# Altium PCB M4QIDB-PCB-01-DONE.PcbDoc
Units mil, origin at the board's own origin, x right, y up, seen from the top; angles counter-clockwise.
Board outline 2500 x 1500 mil, 2 copper layers (Top Layer, Bottom Layer), stack 62.8 mil thick; 91 components, 86 nets, 364 pads, 103 vias.
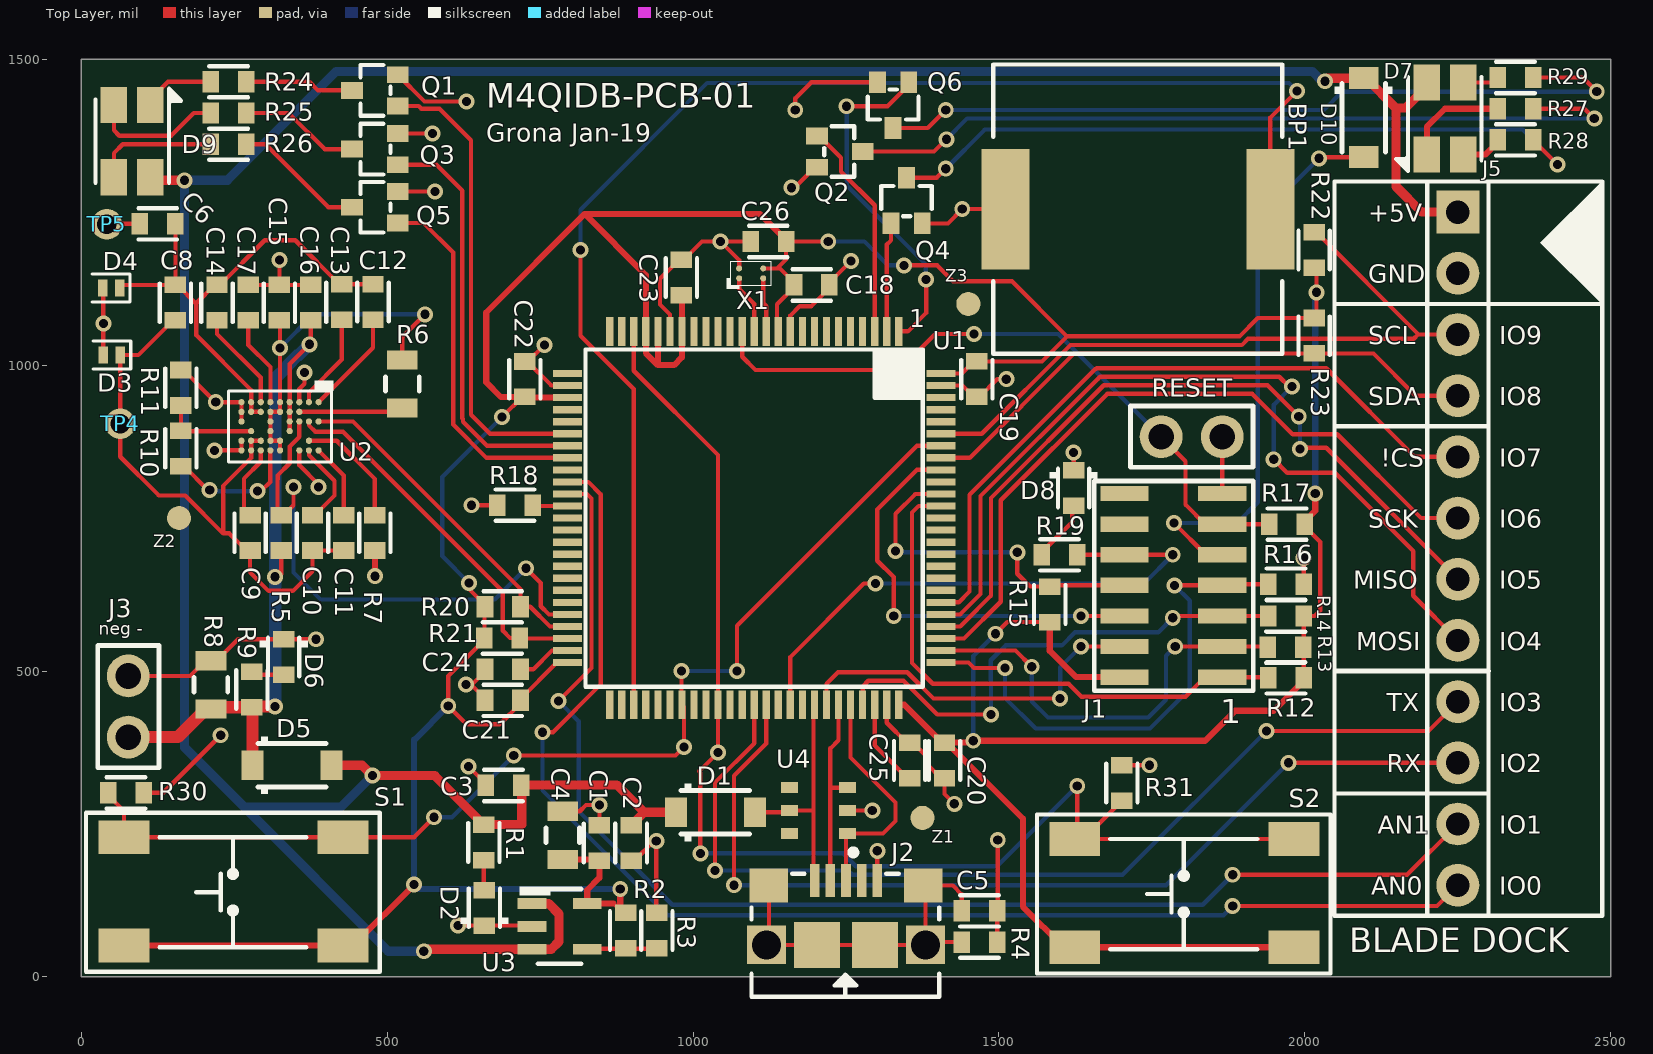
[diagram p0: Top Layer view]
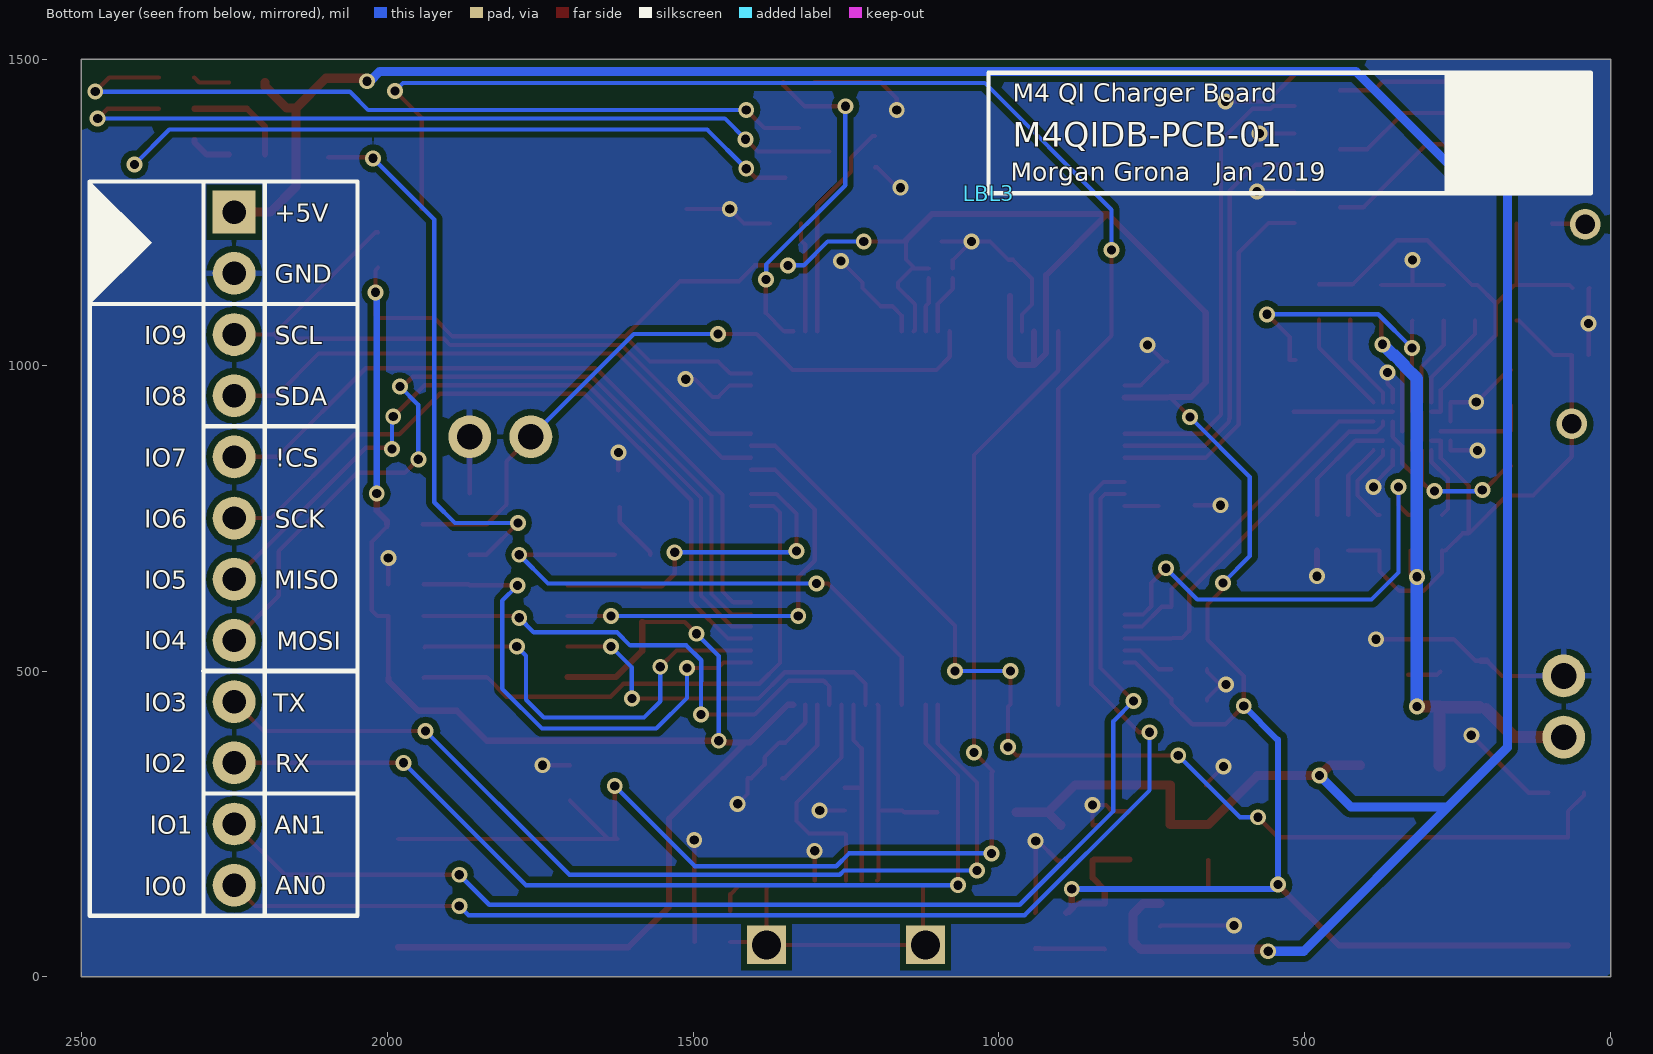
[diagram p1: Bottom Layer view, seen from below]

## Layer stack, top to bottom
Top Solder: solder mask 0.4, Solder Resist, Dk 3.5
Top Layer: signal copper 1.4
Dielectric1: core 60, FR-4, Dk 4.8
Bottom Layer: signal copper 1.4
Bottom Solder: solder mask 0.4, Solder Resist, Dk 3.5

## Board outline
0,0 0,1500 2500,1500 2500,0

## Design rules (kind name [scope] priority, off if disabled: settings)
Clearance ClearancePoly [All vs InPoly] p1: gap=10 ignorepadtopadclearanceinfootprint=FALSE except(0: Arc-Hole Track-Hole SMDPad-Hole THPad-Hole Via-Hole Fill-Hole Poly-Hole Region-Hole Text-Hole)
Clearance [All] p2: gap=5 ignorepadtopadclearanceinfootprint=FALSE except(0: Arc-Hole Track-Hole SMDPad-Hole THPad-Hole Via-Hole Fill-Hole Poly-Hole Region-Hole Text-Hole) // changed to 5 from 7
DiffPairsRouting [All] p1: maxlimit=10 minlimit=10 mostfreqgap=10 toplayer_minwidth=15 toplayer_maxwidth=15 toplayer_prefwidth=15 bottomlayer_minwidth=15 bottomlayer_maxwidth=15 bottomlayer_prefwidth=15 maxuncoupledlength=500
HoleSize [All] p1: absolutevalues=TRUE maxlimit=250 minlimit=7 maxpercent=80.000 minpercent=20.000
HoleToHoleClearance [All] p1: gap=7 allowstackedmicrovias=TRUE
MinimumSolderMaskSliver [All] p1 off: minsoldermaskwidth=4
PolygonConnect PolygonConnectVia [All vs IsVia] p1: connectstyle=Direct reliefconductorwidth=10 reliefentries=4 polygonreliefangle="90 Angle" airgapwidth=10
PolygonConnect [All] p2: connectstyle=Relief reliefconductorwidth=10 reliefentries=4 polygonreliefangle="90 Angle" airgapwidth=10
RoutingVias [All] p1: holewidth=17 width=30 viastyle="Through Hole" minholewidth=17 minwidth=30 maxholewidth=100 maxwidth=100
SilkToSilkClearance [All] p1 off: silktosilkclearance=7
SilkToSolderMaskClearance SilkscreenOverComponentPads [IsPad] p1 off: minsilkscreentomaskgap=7 clearancetoexposedcopper=TRUE
SolderMaskExpansion [All] p1: expansion=4
Width [All] p1: maxlimit=100 minlimit=7 preferedwidth=7 minimp=50.000000 maximp=50.000000 favimp=50.000000
24 further rules are at their usual default settings.

## Classes and differential pairs
differential pair USB_DATA: +USB_DATA_P -USB_DATA_N

## Components (designator, comment, footprint, x,y, rotation, side; value= is the part's Value field where it differs from the comment)
BP1 "PS1240P02AT" "BUZZER SFM-1240" 1727,1255 r270 top
C1 "1uF" "0603 CAP3D" 847,219 r90 top
C2 "0.1uF" "0603 CAP3D" 899,219 r270 top
C3 "1uF" "0603 CAP3D" 690,313 r180 top
C4 "10uF 0805" "0805 CAP3D" 787,231 r90 top
C5 "0.1uF" "0603 CAP3D" 1468,108 r0 top
C6 "100nF 0603" "0603 CAP3D" 125,1231 r180 top
C8 "3.9nF" "0603 CAP3D" 154,1102 r270 top
C9 "15nF" "0603 CAP3D" 276,726 r270 top
C10 "100nF" "0603 CAP3D" 378,726 r270 top
C11 "47nF" "0603 CAP3D" 429,726 r270 top
C12 "47nF" "0603 CAP3D" 477,1103 r90 top
C13 "100nF" "0603 CAP3D" 426,1103 r90 top
C14 "15nF" "0603 CAP3D" 222,1102 r90 top
C15 "15nF" "0603 CAP3D" 324,1102 r270 top
C16 "15nF" "0603 CAP3D" 375,1102 r270 top
C17 "15nF" "0603 CAP3D" 273,1102 r270 top
C18 "1uF" "0603 CAP3D" 1194,1131 r0 top
C19 "1uF" "0603 CAP3D" 1464,977 r270 top
C20 "1uF" "0603 CAP3D" 1411,354 r270 top
C21 "1uF" "0603 CAP3D" 689,452 r180 top
C22 "1uF" "0603 CAP3D" 725,976.9 r90 top
C23 "1uF" "0603 CAP3D" 981,1143 r90 top
C24 "2.2uF" "0603 CAP3D" 689,503 r180 top
C25 "2.2uF" "0603 CAP3D" 1354,354 r90 top
C26 "0.01uF" "0603 CAP3D" 1123,1202 r180 top
D1 "1N5819" SOD123 1037,269 r180 top
D2 "GRN 0603" "0603 AK" 659,113 r270 top
D3 "PESD12VV1BL" SOD882 50,1016.48 r180 top
D4 "PESD12VV1BL" SOD882 49,1126 r180 top
D5 "1N5819" SOD123 345,346 r180 top
D6 "BLU 0603" "0603 AK" 331,523 r90 top
D7 "1N5819" "SOD123 AK" 2096,1404 r90 top
D8 "RED 0603" "0603 AK" 1622,799 r90 top
D9 "RGB PLCC4" "PLCC-4 RGB" 83,1366 r0 top
D10 "RGB PLCC4" "PLCC-4 RGB" 2229,1403 r180 top
J1 "JTAG/SERIAL" "CONN 14POS 7X2 SMT FEMALE" 1785,640 r180 top
J2 "MICRO AB" "CONN USB MICRO B SMT LEGS FCI 10118193" 1250,105 r0 top locked
J3 "CONN SIP 2" HDR1X2 77,442 r90 top
J5 "BLADE Parent" "HDR1X12 ENGENUICS PARENT" 2250,700 r0 top
LBL3 "PCB REV" "LABEL PCB REVISION" 1017,1281 r180 bottom
Q1 "2N7002" SC-70-3 480,1449 r270 top
Q2 "2N7002" SC-70-3 1240,1349 r90 top
Q3 "2N7002" SC-70-3 480,1353 r270 top
Q4 "2N7002" SC-70-3 1349,1269 r180 top
Q5 "2N7002" SC-70-3 480,1258 r270 top
Q6 "2N7002" SC-70-3 1327,1425 r0 top
R1 "390R" 0603 658,220 r90 top
R2 "698k" 0603 890,76 r90 top
R3 "100k" 0603 941,76 r90 top
R4 "100k" 0603 1468,57 r180 top
R5 "100k" 0603 327,726 r90 top
R6 "30R 0805 500mW" 0805 525,969.5 r270 top
R7 "100k" 0603 480,726 r270 top
R8 "90R 0805 500mW" 0805 212,477 r90 top
R9 "1k" 0603 279,470 r90 top
R10 "100k" 0603 163,864 r90 top
R11 "100k" 0603 163,963 r90 top
R12 "10k" 0603 1969,489 r0 top
R13 "10k" 0603 1968,539 r0 top
R14 "10k" 0603 1969,590 r0 top
R15 "10k" 0603 1583,609 r90 top
R16 "10k" 0603 1969,642 r180 top
R17 "100k" 0603 1971,740 r0 top
R18 "100k" 0603 709,771 r180 top
R19 "1k" 0603 1599,690 r0 top
R20 "10k" 0603 689,605 r180 top
R21 "10k" 0603 688,554 r180 top
R22 "10k" 0603 2015,1188 r270 top
R23 "10k" 0603 2015,1048 r90 top
R24 "150R" 0603 241,1463 r0 top
R25 "150R" 0603 241,1412 r0 top
R26 "150R" 0603 241,1361 r0 top
R27 "150R" 0603 2344,1419 r0 top
R28 "150R" 0603 2344,1368 r0 top
R29 "150R" 0603 2344,1470 r0 top
R30 "100k" 0603 73,301 r180 top
R31 "100k" 0603 1701,317 r270 top
RESET "PADS ONLY" HDR1X2 1815,883 r180 top (schematic designator J4)
S1 "SPST" "SWITCH TACT SMT TL3301" 249,140 r180 top
S2 "SPST" "SWITCH TACT SMT TL3301" 1803,137 r180 top
TP4 "A1A" "TEST POINT THRU HOLE" 64,904 r0 top
TP5 "A1B" "TEST POINT THRU HOLE" 42,1230 r0 top
U1 "STM32F407VET6" LQFP100 1100,750 r180 top locked
U2 "STWLC33JR" "FLIP CHIP 3.97x2.67mm" 325,900 r180 top locked
U3 "MCP1824" SOT23-5 782,83 r270 top
U4 "IP4220CZ6,125" TSOP95P280X110-6N 1205,272 r180 top
X1 "SIT8021AC" "CSP 1.55mm x 0.85mm" 1095,1150 r0 top locked
Z1 "PCB" "FIDUCIAL PCB"#1 1562,409 r0 top
Z2 "PCB" "FIDUCIAL PCB"#2 1688,-228 r0 top
Z3 "PCB" "FIDUCIAL PCB"#3 1800,-228 r0 top

## Footprints (in the part's own frame and the unit in brackets; to place one, negate y for a bottom-side part, rotate by r counter-clockwise, add the part's x,y. Pads: shape width x height; smd on the part's side, far side on the other; paste and mask are expansions set on the pad)
0603 [mil]
  rect 27x35 smd: 1(-29,0) 2(29,0)
  silkscreen extent -31,-26 31,26, body extent -33,-18 33,18, height 22
"0603 AK" [mil]
  rect 27x35 smd: A(-29,0) K(29,0)
  silkscreen extent -31,-39 31,39, body extent -33,-18 33,18, height 30
"0603 CAP3D" [mil]
  rect 27x35 smd: 1(-29,0) 2(29,0)
  silkscreen extent -31,-26 31,26, body extent -37,-16 37,16, height 35
0805 [mm]
  rect 0.8x1.27 smd: 1(-0.99,-0.003) 2(1.011,-0.003)
  silkscreen extent -0.29,-0.7 0.31,0.7, body extent -1.05,-0.67 1.05,0.68, height 1.35
"0805 CAP3D" [mm]
  rect 0.8x1.27 smd: 1(-0.99,-0.003) 2(1.011,-0.003)
  silkscreen extent -0.29,-0.7 0.31,0.7, body extent -1.05,-0.67 1.05,0.68, height 0.95
"BUZZER SFM-1240" [mm]
  rect 5x2 smd: 1(0,5.5) 2(0,-5.5)
  silkscreen extent -6,-6 6,6, body extent -6,-6 6,6, height 3
"CONN 14POS 7X2 SMT FEMALE" [mil]
  rect 78.74x25 smd: 1(-80,150) 2(80,150) 3(-80,100) 4(80,100) 5(-80,50) 6(80,50) 7(-80,0) 8(80,0) 9(-80,-50) 10(80,-50) 11(-80,-100) 12(80,-100) 13(-80,-150) 14(80,-150)
  silkscreen extent -131,-170 129,172, body extent -98,-184 98,184, height 173
"CONN USB MICRO B SMT LEGS FCI 10118193" [mm]
  rect 1.6x1.6 hole 1.2: 0(-3.3,-1.337) 0(3.3,-1.337)
  rect 1.6x1.4 smd: 0(-3.2,1.126) 0(3.2,1.127)
  rect 1.9x1.9 smd: 0(-1.2,-1.337) 0(1.2,-1.337)
  rect 0.4x1.35 smd: 1(-1.3,1.338) 2(-0.65,1.338) 3(0,1.338) 4(0.65,1.338) 5(1.3,1.338)
  silkscreen extent -3.93,-3.49 3.87,1.62, body extent -3.99,-3.94 3.99,1.49, height 2.71
"CSP 1.55mm x 0.85mm" [mm]
  round 0.25 smd paste+0 mask+0.1: 1(-0.5,-0.205) 2(0.5,-0.205) 3(0.5,0.205) 4(-0.5,0.205)
  silkscreen extent -1.02,-0.66 0.84,0.5, body extent -0.78,-0.43 0.78,0.43, height 0.6
"FIDUCIAL PCB"#1 [mil]
  round 39.37 smd paste-100 mask+4: 1(-187,-149)
"FIDUCIAL PCB"#2 [mil]
  round 39.37 smd paste-100 mask+4: 1(-1528,978)
"FIDUCIAL PCB"#3 [mil]
  round 39.37 smd paste-100 mask+4: 1(-350,1328)
"FLIP CHIP 3.97x2.67mm" [mm]
  round 0.26 smd paste+0 mask+0.025: A1(-1.6,-1) A3(-1.6,-0.2) A6(-1.6,1) B1(-1.2,-1) B3(-1.2,-0.2) B5(-1.2,0.6) B6(-1.2,1) C1(-0.8,-1) C2(-0.8,-0.6) C3(-0.8,-0.2) C6(-0.8,1) D1(-0.4,-1) D2(-0.4,-0.6) D3(-0.4,-0.2) D4(-0.4,0.2) E1(0,-1) E2(0,-0.6) E5(0,0.6) E6(0,1) F1(0.4,-1) F2(0.4,-0.6) F3(0.4,-0.2) F4(0.4,0.2) F5(0.4,0.6) F6(0.4,1) G1(0.8,-1) G2(0.8,-0.6) G5(0.8,0.6) G6(0.8,1) H1(1.2,-1) H2(1.2,-0.6) H4(1.2,0.2) H5(1.2,0.6) H6(1.2,1) I1(1.6,-1) I2(1.6,-0.6) I3(1.6,-0.2) I5(1.6,0.6) I6(1.6,1)
  silkscreen extent -2.21,-1.91 2.13,1.47, body extent -1.97,-1.32 1.97,1.32, height 0.6
HDR1X2 [mil]
  round 70 hole 42: 1(-50,0) 2(50,0)
  silkscreen extent -100,-50 100,50, body extent -104,-46 104,46, height 425
"HDR1X12 ENGENUICS PARENT" [mil]
  rect 70x70 hole 38: 1(0,550)
  round 70 hole 38: 2(0,450) 3(0,350) 4(0,250) 5(0,150) 6(0,50) 7(0,-50) 8(0,-150) 9(0,-250) 10(0,-350) 11(0,-450) 12(0,-550)
  silkscreen extent -202,-600 236,600, body extent -8,-610 405,610, height 108
"LABEL PCB REVISION" [mil]
  silkscreen extent 0,0 984,197
LQFP100 [mm]
  rect 0.3x1.2 smd mask+0.025: 1(-6,-7.75) 2(-5.5,-7.75) 3(-5,-7.75) 4(-4.5,-7.75) 5(-4,-7.75) 6(-3.5,-7.75) 7(-3,-7.75) 8(-2.5,-7.75) 9(-2,-7.75) 10(-1.5,-7.75) 11(-1,-7.75) 12(-0.5,-7.75) 13(0,-7.75) 14(0.5,-7.75) 15(1,-7.75) 16(1.5,-7.75) 17(2,-7.75) 18(2.5,-7.75) 19(3,-7.75) 20(3.5,-7.75) 21(4,-7.75) 22(4.5,-7.75) 23(5,-7.75) 24(5.5,-7.75) 25(6,-7.75) 51(6,7.75) 52(5.5,7.75) 53(5,7.75) 54(4.5,7.75) 55(4,7.75) 56(3.5,7.75) 57(3,7.75) 58(2.5,7.75) 59(2,7.75) 60(1.5,7.75) 61(1,7.75) 62(0.5,7.75) 63(0,7.75) 64(-0.5,7.75) 65(-1,7.75) 66(-1.5,7.75) 67(-2,7.75) 68(-2.5,7.75) 69(-3,7.75) 70(-3.5,7.75) 71(-4,7.75) 72(-4.5,7.75) 73(-5,7.75) 74(-5.5,7.75) 75(-6,7.75)
  rect 1.2x0.3 smd mask+0.025: 26(7.75,-6) 27(7.75,-5.5) 28(7.75,-5) 29(7.75,-4.5) 30(7.75,-4) 31(7.75,-3.5) 32(7.75,-3) 33(7.75,-2.5) 34(7.75,-2) 35(7.75,-1.5) 36(7.75,-1) 37(7.75,-0.5) 38(7.75,0) 39(7.75,0.5) 40(7.75,1) 41(7.75,1.5) 42(7.75,2) 43(7.75,2.5) 44(7.75,3) 45(7.75,3.5) 46(7.75,4) 47(7.75,4.5) 48(7.75,5) 49(7.75,5.5) 50(7.75,6) 76(-7.75,6) 77(-7.75,5.5) 78(-7.75,5) 79(-7.75,4.5) 80(-7.75,4) 81(-7.75,3.5) 82(-7.75,3) 83(-7.75,2.5) 84(-7.75,2) 85(-7.75,1.5) 86(-7.75,1) 87(-7.75,0.5) 88(-7.75,0) 89(-7.75,-0.5) 90(-7.75,-1) 91(-7.75,-1.5) 92(-7.75,-2) 93(-7.75,-2.5) 94(-7.75,-3) 95(-7.75,-3.5) 96(-7.75,-4) 97(-7.75,-4.5) 98(-7.75,-5) 99(-7.75,-5.5) 100(-7.75,-6)
  silkscreen extent -7,-7 7,7
"PLCC-4 RGB" [mm]
  rect 1.1x1.5 smd: A(0.75,-1.5) KB(-0.75,-1.5) KG(-0.75,1.5) KR(0.75,1.5)
  silkscreen extent -1.51,-1.73 2.03,2.17, body extent -1.5,-2 1.5,2, height 2.2
SC-70-3 [mm]
  rect 0.7x0.9 smd paste+0: 1(0.65,0.95) 2(-0.65,0.95) 3(0,-0.95)
  silkscreen extent -1.05,-0.6 1.05,0.65, body extent -1.07,-0.95 1.08,0.95, height 1.1
SOD123 [mil]
  rect 36x48 smd: 1(-64.09,-0.13) 2(64.91,-0.13)
  silkscreen extent -56,-47 56,47, body extent -76,-33 75,34, height 57
"SOD123 AK" [mil]
  rect 36x48 smd: A(-64.09,-0.13) K(64.91,-0.13)
  silkscreen extent -56,-47 56,47, body extent -76,-33 75,34, height 57
SOD882 [mm]
  rect 0.4x0.7 smd paste-0.05 mask+0.05: 1(-0.35,0) 2(0.35,0)
  silkscreen extent -0.79,-0.58 0.79,0.58, body extent -0.65,-0.45 0.65,0.45, height 0.5
SOT23-5 [mm]
  rect 0.45x1.2 smd mask+0.025: 1(-0.94,-1.153) 2(0.011,-1.153) 3(0.96,-1.153) 4(0.96,1.147) 5(-0.94,1.147)
  silkscreen extent -1.65,-1.68 1.56,0.9, body extent -1.55,-1.6 1.55,1.6, height 1.5
"SWITCH TACT SMT TL3301" [mil]
  rect 83x55 smd: 1(-179,-88.5) 2(179,-88.5) 3(-179,88.5) 4(179,88.5)
  silkscreen extent -239,-129 241,132, body extent -200,-118 200,118, height 201
"TEST POINT THRU HOLE" [mil]
  round 50 hole 32: 1(0,0)
TSOP95P280X110-6N [mm] "TSOP, 6-Leads, Body 3.1x1.7mm (max), Pitch 0.95mm, IPC Medium Density"
  rect 0.7x0.45 smd: 1(-1.2,0.95) 2(-1.2,0) 3(-1.2,-0.95) 4(1.2,-0.95) 5(1.2,0) 6(1.2,0.95)
  silkscreen extent -1.57,1.61 -1.32,1.86, body extent -1.5,-1.55 1.5,1.55, height 1.25

## Part data
BP1: library part "BUZZER SMT SFM-1240"
C1 C2 C3 C4 C5 C6 C8 C9 C10 C11 C12 C13 C14 C15 C16 C17 C18 C19 C20 C21 C22 C23 C24 C25 C26: library part "CAPACITOR NON-POLARIZED"
D1 D5: library part "DIODE SCHOTTKY"
D2: library part "LED T1-3/4", "LED"
D3 D4: library part "DIODE ESD PESD12VVBL"
D6 D8: library part "LED AK"
D7: library part "DIODE SCHOTTKY AK"
D9 D10: library part "LED RGB AK"
J1: library part "CONN JTAG/SERIAL DEBUG 14POS FEMALE ENGENUICS"
J2: library part "CONN USB MICRO AB FCI 10104111"
J3: library part "CONN 2POS MOLEX 5037630291"
J5: library part "CONN ENGENUICS BLADE PARENT"
LBL3: library part "LABEL PCB REVISION"
Q1 Q2 Q3 Q4 Q5 Q6: library part "TRANS NMOS 1G 2S 3D"
R1 R2 R3 R4 R5 R6 R7 R8 R9 R10 R11 R12 R13 R14 R15 R16 R17 R18 R19 R20 R21 R22 R23 R24 R25 R26 R27 R28 R29 R30 R31: library part RESISTOR
RESET: library part "CONN SIP 2"
S1 S2: library part "SWITCH SPST", "SPST TACT SWITCH"
TP4 TP5: library part "TEST POINT THRU HOLE"
U1: library part "MCU STM32F407Vx M4QIDB"
U2: library part "IC WIRESLESS CHARGER STWLC33JR"
U3: library part "VREG MCP1824"
U4: library part "IC ESD USB DUAL NXP IP4220CZ6"
X1: library part "IC OSCILLATOR SIT8021AC"
Z1 Z2 Z3: library part "FIDUCIAL PCB"

## Via types
v1: diameter 26, hole 15, Top Layer to Bottom Layer, tented both sides, 103 vias

## Nets (pads, with @x,y where several pads share a name; then routed paths per layer and width w, separated by ;. In a path a pad name is that pad's centre, name@x,y a point inside that pad or via, vN(x,y) a via of type N, cw(c..) or ccw(c..) an arc to the next point about the centre after c; other vN are vias at no path point)
3.0V: 
+5V: C2.1 C3.1 D1.2 D5.1 D7.K D9.A D10.A J5.1 R1.2 U3.1 U3.3 | length 5188
  Top Layer w15: D9.A 116.47,1303 117.47,1304 119.47,1302 v1(169,1302) ; D5.1 459,346.13 v1(476,329.13) 577.87,329.13 R1.2 720,249 720,314 875.25,314 920.13,269.13 ; v1(560,42) 563.19,45.19 U3.3 768.19,45.19 781,58 781,102.98 763.99,119.99 U3.1 ; C2.1 920.13,269.13 ; D1.2 920.13,269.13 ; v1(2033,1464) 2037.91,1468.91 D7.K 2100.09,1468.91 2149,1420 ; D10.A 2199.47,1455.47 2164,1420 2149,1420 ; J5.1 2191,1250 2149,1292 2149,1420
  Bottom Layer w15: v1(476,329.13) 424.87,278 266,278 ; v1(560,42) 502,42 266,278 ; v1(2033,1464) 2028,1464 2012,1480 417,1480 239,1302 v1(169,1302) 169,375 266,278
+5V_IO: 
AN8: J5.12 U1.35 | length 2196.5
  Top Layer w7: v1(754,400) 771,400 849,478 849,789 828.94,809.06 U1.35 ; v1(1882,116) 2216,116 J5.12
  Bottom Layer w7: v1(754,400) 754,305 958,101 1867,101 v1(1882,116)
AN9: J5.11 U1.36 | length 2144.3
  Top Layer w7: v1(780,451) 834,505 834,782 826.63,789.37 U1.36 ; v1(1882,167) 2167,167 J5.11
  Bottom Layer w7: v1(780,451) 813,418 813,271 966,118 1833,118 v1(1882,167)
BUTTON0: R30.2 S1.1 S1.2 U1.57 U1.94 | length 1805.3
  Top Layer w7: R30.2 44,297 70,271 S1.2 S1.1 544.37,228.5 v1(576.87,261) ; v1(707,362) 971.34,362 v1(985.17,375.83) 985.17,441.6 U1.57 981,445.77 v1(981,500) ; v1(1072,500) 1072,574 1366.11,868.11 U1.94
  Bottom Layer w7: v1(576.87,261) 606,261 v1(707,362) ; v1(981,500) v1(1072,500)
BUTTON1: R31.2 S2.1 S2.2 U1.23 U1.60 | length 2137.3
  Top Layer w7: U1.23 903.15,990.85 1040.94,853.06 U1.60 v1(1040.94,366.94) 1010,336 1012,334 v1(1012,202) ; v1(1628,312) 1628,229.5 S2.2 S2.2@1638.5,225.5 ; R31.2 S2.2@1638.5,225.5 ; S2.1 S2.2@1638.5,225.5
  Bottom Layer w7: v1(1012,202) 1245,202 1266,181 1497,181 v1(1628,312)
BUZZER: BP1.1 U1.53 | length 2318.3
  Top Layer w7: v1(816,1188) 816,1048 903.15,960.85 U1.53 ; BP1.1 1943.54,1404.54 v1(1987,1448)
  Bottom Layer w7: v1(816,1188) 816,1254 1023,1461 1974,1461 v1(1987,1448)
CGND: C5.1 J2.0 R4.2 | length 614.1
  Top Layer w7: J2.0@1124.02,149.34 1124.02,56.28 1120.08,52.34 1202.76,52.34 1297.24,52.34 J2.0@1379.92,52.34 ; R4.2 1384.58,57 J2.0@1379.92,52.34 ; C5.1 1439,135 1424.65,149.35 1375.98,149.35 1379.92,145.41 J2.0@1379.92,52.34
CS3: J5.5 U1.81 | length 1156.1
  Top Layer w7: U1.81 1434.2,612.2 1452,630 1452,788 1658,994 1658.6,994 1659.6,995 2035,995 2180,850 J5.5
GND: BP1.2 C1.2 C2.2 C3.2 C4.2 C5.2 C15.1 C16.1 C17.1 C18.2 C19.2 C20.2 C21.2 C22.2 C23.2 C24.2 C25.2 C26.2 D2.K D3.2 D4.2 D6.K D8.K J1.13 J2.5 J3.2 J5.2 Q1.2 Q2.2 Q3.2 Q4.2 Q5.2 Q6.2 R3.2 R4.1 R7.2 R8.2 R11.2 R16.1 R18.2 R30.1 R31.1 RESET.1 U1.10 U1.20 U1.27 U1.74 U1.99 U2.C1 U2.C6 U2.I1 U2.I2 U2.I3 U2.I5 U2.I6 U3.2 U4.2 X1.4 | length 3735.2
  Top Layer w7: D4.2 36.22,1125 v1(36.22,1068.22) D3.2 ; J3.2 178,492 R8.2@202.78,516.78 ; R30.1 134,301 v1(228,395) ; R11.2 167,992 219.63,939.37 U2.I1 U2.I2 U2.I3 ; R8.2 221.32,516.78 256.54,552 D6.K v1(384,552) ; v1(217.63,860.63) U2.I6 U2.I5 ; C17.1 C15.1 ; v1(324,1172) C15.1 ; U2.C6 356.5,836.5 388,805 v1(388,801) ; U2.C1 356.5,961 365,969.5 v1(365,988) ; C16.1 C15.1 ; Q5.2 v1(578.41,1283.59) ; Q3.2 v1(574.41,1378.59) ; Q1.2 560.99,1431 v1(630,1431) ; v1(616,84) D2.K 735.18,84 U3.2 ; v1(629,478) 639,478 660,499 C24.2 ; v1(633.21,344) 661,316.21 C3.2 ; v1@638,477 660,455 C21.2 ; v1(638,771) R18.2 ; C22.2 C22.2@729.1,1005.9 ; v1(757,1033) 729.9,1005.9 C22.2@729.1,1005.9 ; C4.2@789.91,268 C4.2 814.78,270.78 825,281 v1(847,281) C1.2 C1.2@835.94,248 ; U1.27 768.46,966.54 C22.2@729.1,1005.9 ; C2.2 904,190 936,222 v1(940,222) 940,106 R3.2 ; U1.20 962.2,1082.8 946,1099 946,1141 977,1172 C23.2 984.57,1172 1014.57,1202 v1(1045,1202) ; X1.4 1075.31,1171.69 v1(1045,1202) ; C26.2 v1(1045,1202) ; U1.10 1159.06,1081.06 1174.39,1096.39 1193.39,1096.39 1223,1126 C18.2 1223,1135 v1(1258,1170) ; v1(1161,1290) 1166,1290 1199.41,1323.41 Q2.2 ; v1(1167,1417) 1167,1436 1193.4,1462.4 Q6.2 ; U4.2 v1(1293,272) ; J2.5 v1(1301.18,206.18) ; U1.74 1316.54,415.46 1349,383 C25.2 1359,383 1383,359 1383,347 1405,325 C20.2 1411,299 v1(1427,283) ; Q4.2 1416.6,1231.6 v1(1440,1255) BP1.2 ; U1.99 1440.46,966.54 1459,948 C19.2 1468,948 1497,977 v1(1512,977) ; R4.1 C5.2 1498,109 v1(1498,224) ; D8.K v1(1622,857) ; R31.1 v1(1746,346) ; J1.13 RESET.1 ; R16.1 v1(1998,685)
  Top Layer w10: R8.2@202.78,516.78 R8.2 ; v1(480,655) R7.2
  other v1: 220,939.5
GNDIO: 
I2C2_SCL: R20.1 U1.47 U2.A3 | length 562.7
  Top Layer w7: U2.A3 444.13,907.87 718,634 R20.1 734,605 766.17,572.83 U1.47
I2C2_SDA: R21.1 U1.48 U2.B3 | length 610.8
  Top Layer w7: U2.B3 372.24,901.53 382.78,891 428,891 689,630 689,566 701,554 R21.1 717.85,553.15 U1.48
LED0_BLU: Q5.1 U1.33 | length 601.1
  Top Layer w7: Q5.1 559.59,1232.41 608,1184 608,903 662.57,848.43 U1.33
LED0_GRN: Q3.1 U1.32 | length 688.3
  Top Layer w7: Q3.1 580.59,1327.41 623,1285 623,913.2 624,912.2 624,907.48 663.37,868.11 U1.32
LED0_RED: Q1.1 U1.31 | length 762.1
  Top Layer w7: Q1.1 551.61,1423.41 556.02,1419 585.59,1419 637,1367.59 637,919 668.2,887.8 U1.31
LED1_BLU: Q6.1 U1.1 | length 569.7
  Top Layer w7: v1(1251,1423) 1318,1423 1352.59,1457.59 Q6.1 ; U1.1 1351.12,1055.12 1381,1085 v1(1381,1140)
  Bottom Layer w7: v1(1251,1423) 1251,1294 1380.5,1164.5 1380.5,1151.09 1381,1150.59 v1(1381,1140)
LED1_GRN: Q4.1 U1.2 | length 179.3
  Top Layer w7: U1.2 1316.54,1197 1323.41,1203.87 Q4.1
LED1_RED: Q2.1 U1.3 | length 360.7
  Top Layer w7: Q2.1 1206.41,1374.59 1242,1339 1242,1316 1296.85,1261.15 U1.3
MISO3: J5.7 U1.79 | length 1264.6
  Top Layer w7: U1.79 1436.83,572.83 1465,601 1465,601.2 1487,623.2 1487,782.8 1671.2,967 1939,967 v1(1990,916) ; v1(1992,863) 1994,865 2035,865 J5.7
  Bottom Layer w7: v1(1990,916) 1992,914 v1(1992,863)
MOSI3: J5.8 U1.80 | length 1436.5
  Top Layer w7: U1.80@1407.64,590 U1.80 1436.52,592.52 1470,626 1470,786 1660.9,976.9 1661.3,976.9 1665.4,981 1958,981 1974,965 v1(1979,965) ; v1(1949,846) 1971,824 2049,824 2177,696 2177,623 J5.8
  Bottom Layer w7: v1(1949,846) 1949,935 v1(1979,965)
NetC6_1: C6.1 C8.1 C12.2 C13.2 C14.2 D4.1 U2.G2 U2.H1 U2.H2 | length 827.5
  Top Layer w7: D4.1 67.78,1131 C8.1 C6.1 ; C8.1@158,1130 188,1100 ; U2.G2 U2.H2 U2.H1 277.76,959.24 188,1049 188,1100 ; C12.2 C13.2 422,1132 350,1204 300,1204 227,1131 C14.2 218,1131 188,1101 188,1100
NetC6_2: C6.2 TP5.1 | length 54.4
  Top Layer w7: TP5.1 43,1231 C6.2
NetC7_1: 
NetC8_2: C8.2 C9.2 C10.2 C11.2 D3.1 TP4.1 U2.G5 U2.H5 U2.H6 | length 986.1
  Top Layer w7: C8.2 150,1073 93.48,1016.48 D3.1 63.78,850.22 127,787 170,787 232,725 ; C9.2@272,697 270,697 242,725 232,725 ; C9.2 276,661.37 306.37,631 346,631 378,663 C10.2 C11.2 ; U2.G5 U2.H5 U2.H6 277.76,848.13 232,802.37 232,725
NetC9_1: C9.1 U2.G6 | length 121.2
  Top Layer w7: C9.1 266,765 266,814.5 293.5,842 U2.G6
NetC10_1: C10.1 U2.B6 | length 140.2
  Top Layer w7: U2.B6 372.24,852.76 414,811 414,787 382,755 C10.1
NetC11_1: C11.1 U2.A6 | length 122.6
  Top Layer w7: U2.A6 429,819.62 C11.1
NetC12_1: C12.1 U2.A1 | length 171.5
  Top Layer w7: U2.A1 477,1028.38 C12.1
NetC13_1: C13.1 U2.B1 | length 156.9
  Top Layer w7: U2.B1 372.24,955.24 426,1009 C13.1
NetC14_1: C14.1 U2.G1 | length 163.2
  Top Layer w7: C14.1 222,1051 293.37,979.63 293.37,939.5 U2.G1
NetC15_2: C15.2 R6.1 U2.E1 U2.E2 U2.E5 U2.E6 U2.F2 U2.F3 U2.F4 U2.F5 | length 603
  Top Layer w7: C15.2 325,1072 v1(325,1028) U2.E1 U2.E2 U2.F2 U2.F3 U2.F4 U2.F5 U2.E5 U2.E6 ; R6.1@515.83,1008.46 R6.1 524.87,1045.87 v1(562,1083)
  Bottom Layer w7: v1(325,1028) 380,1083 v1(562,1083)
NetC17_2: C17.2 U2.F1 | length 148.6
  Top Layer w7: C17.2 273,1033 309.25,996.75 U2.F1
NetC24_1: C24.1 U1.49 | length 89.5
  Top Layer w7: C24.1 739,503 769.46,533.46 U1.49
NetC25_1: C25.1 U1.73 | length 145.9
  Top Layer w7: U1.73 1296.85,378.15 1350,325 C25.1
NetD2_A: D2.A R1.1 | length 49.4
  Top Layer w7: R1.1 658,143 D2.A
NetD6_A: D6.A R9.2 | length 54.1
  Top Layer w7: R9.2 284,494 D6.A
NetD7_A: D7.A J1.9 | length 929
  Top Layer w7: v1(1786,742) 1838,690 J1.9 ; v1(2023,1338) 2024.91,1339.91 D7.A
  Bottom Layer w7: v1(1786,742) 1889,742 1923,776 1923,1238 v1(2023,1338)
NetD8_A: D8.A R19.1 | length 98.7
  Top Layer w7: R19.1 1570,694 1620,744 D8.A@1620,768
NetD9_KB: D9.KB R26.1 | length 204.1
  Top Layer w7: D9.KB 53.47,1346.47 68,1361 R26.1
NetD9_KG: D9.KG R25.1 | length 218.8
  Top Layer w7: D9.KG 53.47,1383.73 62.2,1375 147,1375 184,1412 R25.1
NetD9_KR: D9.KR R24.1 | length 120.2
  Top Layer w7: D9.KR 112.53,1433.53 142,1463 R24.1
NetD10_KB: D10.KB R29.1 | length 59.8
  Top Layer w7: D10.KB 2307.06,1462.06 R29.1
NetD10_KG: D10.KG R28.1 | length 68.8
  Top Layer w10: D10.KG 2294.94,1343.94 2315,1364 R28.1
NetD10_KR: D10.KR R27.1 | length 173.3
  Top Layer w10: D10.KR 2199.47,1389.47 2229,1419 R27.1
NetJ1_1: J1.1 R12.1 U1.89 | length 916
  Top Layer w7: U1.89 1368.69,769.69 1358,759 1358,513 1391.89,479.11 1613.89,479.11 1635,458 1805,458 1837,490 J1.1 1939,490 R12.1
NetJ1_3: J1.3 R13.1 U1.77 | length 703
  Top Layer w7: U1.77 1527.13,533.46 v1(1553.6,507) ; v1(1788,540) J1.3 1938,540 R13.1
  Bottom Layer w7: v1(1553.6,507) 1553.6,450.4 1580,424 1744,424 1773,453 1773,525 v1(1788,540)
NetJ1_5: J1.5 R14.1 U1.72 | length 838.6
  Top Layer w7: U1.72 1277.17,474.83 1286.33,484 1344,484 1399,429 v1(1487,429) ; v1(1784,587) 1787,590 J1.5 R14.1
  Bottom Layer w7: v1(1487,429) 1487,483 1486.5,483.5 1486.5,517.5 1511,542 1602.77,542 1624.27,563.5 1760.5,563.5 v1(1784,587)
NetJ1_7: J1.7 R16.2 U1.76 | length 840.3
  Top Layer w7: U1.76 1450.22,513.78 1459,505 v1(1510,505) ; v1(1787,640) J1.7 1867,642 R16.2
  Bottom Layer w7: v1(1510,505) 1510,456 1560,406 1747,406 1812,471 1812,615 v1(1787,640)
NetQ1_3: Q1.3 R24.2 | length 178.4
  Top Layer w7: R24.2 373,1463 387,1449 Q1.3
NetQ2_3: Q2.3 R27.2 | length 1324.6
  Top Layer w7: Q2.3 1394,1349 v1(1414,1369) ; R27.2 2457,1419 v1(2473,1403)
  Bottom Layer w7: v1(1414,1369) 1448,1403 1460,1403 v1(2473,1403)
NetQ3_3: Q3.3 R25.2 | length 197
  Top Layer w7: R25.2 339,1412 398,1353 Q3.3
NetQ4_3: Q4.3 R28.2 | length 1176.7
  Top Layer w7: Q4.3 1398.4,1306.4 v1(1413,1321) ; R28.2 v1(2413,1328)
  Bottom Layer w7: v1(1413,1321) 1477,1385 2356,1385 v1(2413,1328)
NetQ5_3: Q5.3 R26.2 | length 220.3
  Top Layer w7: R26.2@270,1356 R26.2 301,1361 404,1258 Q5.3
NetQ6_3: Q6.3 R29.2 | length 1288.1
  Top Layer w7: Q6.3 1383.6,1387.6 v1(1413,1417) ; R29.2 2454,1470 v1(2477,1447)
  Bottom Layer w7: v1(1413,1417) 2031,1417 2061,1447 v1(2477,1447)
NetR2_1: R2.1 R3.1 U3.4 | length 123.6
  Top Layer w7: U3.4 827.96,46 R3.1@932,46 ; R3.1@941,46 R3.1@932,46 ; R3.1 933,47 R3.1@932,46
NetR6_2: R6.2 U2.C2 | length 162.3
  Top Layer w7: U2.C2 R6.2@518.78,923.62
NetR7_1: R7.1 U2.B5 | length 192.6
  Top Layer w7: U2.B5 417.62,876.38 480,814 R7.1
NetR10_1: R10.1 U2.F6 | length 220.7
  Top Layer w7: R10.1 168,835 207,796 v1(210,796) ; v1(288,794) 294,794 309,809 309,818.25 309.12,818.37 U2.F6@309.12,860.5
  Bottom Layer w7: v1(210,796) 212,794 v1(288,794)
NetR10_2: R10.2 R11.1 U2.H4 | length 156.1
  Top Layer w7: R11.1 R10.2 163.87,892.13 U2.H4
NetR18_1: R18.1 U1.37 | length 55.6
  Top Layer w7: R18.1@739.31,769.69 U1.37
NetTP6_1: U1.6
NetTP7_1: U1.67
NetTP8_1: U1.7
NetTP9_1: U1.8
NetTP10_1: U1.9
OSC_IN: U1.12 X1.2 | length 88.9
  Top Layer w7: X1.2 1114.69,1101.39 1119.69,1096.39 U1.12
OSC_OUT: U1.13 X1.1 | length 97
  Top Layer w7: X1.1 1075.31,1124.69 1100,1100 U1.13
QI_INT: R5.2 U1.46 U2.C3 | length 907.4
  Top Layer w7: v1(347,801) 347,771 331,755 R5.2 321,761 321,813.28 321.12,813.4 321.12,819.74 340.88,839.5 340.88,867.1 356.5,882.72 U2.C3 ; v1(727,668) 751,644 751,606 764.48,592.52 U1.46
  Bottom Layer w7: v1(347,801) 347,661 391,617 676,617 v1(727,668)
RESET: J1.11 R17.1 RESET.2 U1.14 | length 1107
  Top Layer w7: U1.14 1080.31,1013.69 1102,992 1337,992 1396,1051 v1(1459,1051) ; RESET.2 1805,843 1805,772 1837,740 J1.11 R17.1
  Bottom Layer w7: v1(1459,1051) 1597,1051 RESET.2
SCK3: J5.6 U1.78 | length 1191.7
  Top Layer w7: U1.78 1442.94,553.15 1503,613.2 1503,779 1677,953 1914,953 1980,887 2053,887 2190,750 J5.6
SCL1: J5.3 R22.1 U1.95 | length 1151.8
  Top Layer w7: U1.95 1471.8,887.8 1617,1033 1897,1033 1907,1043 2178,1043 2185,1050 ; R22.1 2019,1217 2185,1051 2185,1050 ; J5.3 2185,1050
SDA1: J5.4 R23.1 U1.93 | length 944.1
  Top Layer w7: U1.93 1452.22,848.43 1622.8,1019 R23.1 2112,1019 2181,950 J5.4
TICK: J1.10 R19.2 U1.66 | length 928.3
  Top Layer w7: U1.66 1159.06,523.06 1279,643 v1(1298,643) ; R19.2 J1.10 v1(1784,690)
  Bottom Layer w7: v1(1298,643) 1737,643 v1(1784,690)
TRST: J1.8 R15.2 U1.90 | length 567.1
  Top Layer w7: v1(1331,696) 1331,757 1363.37,789.37 U1.90 ; v1(1530,694) 1530,659 1551,638 R15.2 ; R15.2@1583,640 J1.8
  Bottom Layer w7: v1(1331,696) 1333,694 v1(1530,694)
U1_PIMO: J1.4 U1.69 | length 611.8
  Top Layer w7: U1.69 1218.11,479.11 1237,498 1350,498 1393,455 v1(1600,455) ; v1(1634,540) J1.4
  Bottom Layer w7: v1(1600,455) 1600,506 v1(1634,540)
U1_POMI: J1.6 U1.92 | length 693.2
  Top Layer w7: v1(1328,590) 1328,653.54 1301.18,680.35 1301.18,764.18 1366,829 1404.86,829 U1.92 ; v1(1634,590) J1.6
  Bottom Layer w7: v1(1328,590) v1(1634,590)
URX6: J5.10 U1.64 | length 1582.5
  Top Layer w7: v1(1067,150) 1067,329 1119.69,381.69 U1.64 ; v1(1973,350) J5.10
  Bottom Layer w7: v1(1067,150) 1773,150 v1(1973,350)
USB_DATA_N: J2.2 U1.70 U4.3 | length 320.2
  Top Layer w7: J2.2 1224.41,373.61 1237.8,387 1237.8,407 U1.70 ; 1224.81,309.4 U4.3
USB_DATA_P: J2.3 U1.71 U4.1 | length 382.2
  Top Layer w7: J2.3 U4.1@1250,232.35 ; U4.1 1276.4,234.6 1310.6,234.6 1331,255 1331,285 1257.48,358.52 U1.71
USB_VBUS: D1.1 J2.1 U1.68 U4.5 | length 385.7
  Top Layer w7: D1.1 1154.88,269.13 U4.5 1197,272 ; U1.68 1197,443.46 1197,272 ; J2.1 1197,159.48 1197,272
UTX6: J5.9 U1.63 | length 1631.5
  Top Layer w7: v1(1036,174) 1036,317.8 1100,381.8 U1.63 ; v1(1937,402) 2202,402 J5.9
  Bottom Layer w7: v1(1036,174) 1253.2,174 1260.2,167 1702,167 v1(1937,402)
VCC: C1.1 C4.1 C18.1 C19.1 C20.1 C21.1 C22.1 C23.1 C26.1 J1.2 R2.2 R12.2 R13.2 R14.2 R15.1 R17.2 R20.2 R21.2 R22.2 R23.2 S1.3 S1.4 S2.3 S2.4 U1.11 U1.19 U1.21 U1.22 U1.28 U1.50 U1.75 U1.100 U3.5 X1.3 | length 7738.8
  Top Layer w7: v1(634,644) 634,634 659,609 R21.2 659,551 600,492 v1(600,443) 630,413 684,413 718,447 C21.1 718,454.54 777.24,513.78 U1.50 ; v1(688,915) 720.9,947.9 C22.1 ; C1.1@844.96,192.04 C1.1 ; 870.01,119.99 885,105 R2.2 ; X1.3 1137.39,1158.07 ; U1.11 1137.39,1057.1 1137.39,1099.39 1165,1127 C18.1 1165,1135 1141.93,1158.07 1137.39,1158.07 ; C26.1 1152,1172.69 1137.39,1158.07 ; C26.1@1156,1202 v1(1221,1202) ; v1(1345,1163) 1399,1163 1425,1137 1521.2,1137 1611.2,1047 ; U1.100 1439.22,986.22 1459,1006 C19.1 1570.2,1006 1611.2,1047 ; v1(1494.59,561) 1513.59,580 R15.1 ; R12.2 R14.2 2016,590 2025,599 2025,711 2000,736 R17.2 ; R22.2 2019,1155 v1(2019,1119) 2019,1081 R23.2 1923,1077 1893,1047 1611.2,1047
  Top Layer w10: S1.4 S1.3 444.5,51.5 v1(544,151) ; C22.1@720.9,947.9 686,947.9 662,971.9 662,1086 823,1247 ; C22.1@725,946.85 U1.28 ; C4.1 C1.1@844.96,192.04 ; C1.1 847,162 827.15,142.15 U3.5 870.01,119.99 ; v1(881,144) 881,114 R2.2 ; U1.21 942.52,1000 ; C23.1@981.89,1113.11 U1.19 981.89,1012.89 969,1000 942.52,1000 ; C26.1 1152,1204 1109,1247 823,1247 ; U1.75 1345.12,444.88 1407,383 C20.1 C20.1@1415,383 ; R15.1 1583,533 1626,490 J1.2 ; S2.3 S2.4 1605.5,48.5 1539,115 1539,259 C20.1@1415,383 ; R12.2 1998,484 1949,435 1886,435 1837,386 v1(1458,386) 1455,383 C20.1@1415,383 ; R17.2 2000,745 2017,762 v1(2017,790) ; 823,1247 922.83,1147.17 U1.22 922.83,1019.69 942.52,1000
  Bottom Layer w7: v1(634,644) 590,688 590,817 v1(688,915) ; v1(1221,1202) 1280,1202 1319,1163 v1(1345,1163) ; v1(1458,386) 1458,524.41 v1(1494.59,561) ; v1@2017,1117 v1(2019,1119)
  Bottom Layer w10: v1(600,443) 545,388 544,388 v1(544,151) 551,144 v1(881,144) ; v1(2017,790) 2017,1069 v1@2017,1117
VCC_IO: 
VCHG: C16.2 D5.2 J3.1 R5.1 R8.1 R9.1 U2.D1 U2.D2 U2.D3 U2.D4 | length 1205
  Top Layer w7: R8.1@204.04,438.04 R8.1 R8.1@215.08,441 ; v1(317,654) 327,658 R5.1 ; U2.D4 U2.D3 U2.D2 U2.D1 340.75,1001.75 v1(373,1034) 375,1036 C16.2
  Top Layer w20: J3.1 158,392 R8.1@204.04,438.04 ; R8.1@215.08,441 R9.1 ; D5.2 280.09,439.91 R9.1 ; v1(317,442) 280,442 R9.1
  Bottom Layer w20: v1(317,442) v1(317,654) ; v1@317,666 317,978 337,998 337,999.6 353.4,1016 355,1016 v1(373,1034)
pads on no net: J1.12 J1.14 J2.4 U1.4 U1.5 U1.15 U1.16 U1.17 U1.18 U1.24 U1.25 U1.26 U1.29 U1.30 U1.34 U1.38 U1.39 U1.40 U1.41 U1.42 U1.43 U1.44 U1.45 U1.51 U1.52 U1.54 U1.55 U1.56 U1.58 U1.59 U1.61 U1.62 U1.65 U1.82 U1.83 U1.84 U1.85 U1.86 U1.87 U1.88 U1.91 U1.96 U1.97 U1.98 U4.4 U4.6 Z1.1 Z2.1 Z3.1

## Polygon pours and split planes (outlines as drawn)
GND on Bottom Layer "GND Plate" (solid, remove dead copper, pour order 44): 0,0 0,1500 2500,1500 2500,0 2497,1
GND on Bottom Layer "Bottom Layer-GND" (solid, pour order 20): 2452,1488
GND on Bottom Layer "Bottom Layer-GND 1" (solid, pour order 18): 1242,1490
GND on Bottom Layer "Bottom Layer-GND 2" (solid, pour order 14): 17,1466
no net on Bottom Layer "Bottom Layer-No Net" (solid, pour order 0): 1162,843

## Silkscreen, mask and mechanical layers (free items; w line width, h text height)
Top Overlay:
  text "M4QIDB-PCB-01" at 662,1421 h40
  text "Grona Jan-19" at 662,1365 h30
  text "neg -" at 29,559 h20
Mechanical 1:
  the board outline again, w7

## Text inside footprints (layer, text, board x,y; h text height)
J1: Top Overlay "1" at 1862,415 h39.37
J2: Mechanical 1 "BOARD EDGE" at 1150,-17.56 h7.87
J5: Mechanical 5 "BOARD EDGE" at 2298,9 h20; Top Overlay "IO9" at 2317.39,1034.25 h30; Top Overlay "IO8" at 2317.39,934.25 h30; Top Overlay "IO7" at 2317.39,834.25 h30; Top Overlay "IO6" at 2317.39,734.25 h30; Top Overlay "IO5" at 2317.39,634.25 h30; Top Overlay "IO4" at 2317.39,534.25 h30; Top Overlay "IO3" at 2317.39,434.25 h30; Top Overlay "IO2" at 2317.39,334.25 h30; Top Overlay "IO1" at 2317.39,234.25 h30; Top Overlay "IO0" at 2317.39,134.25 h30; Top Overlay "+5V" at 2103.73,1234.25 h30; Top Overlay "GND" at 2103.73,1134.25 h30; Top Overlay "SCL" at 2103.73,1034.25 h30; Top Overlay "SDA" at 2103.73,934.25 h30; Top Overlay "!CS" at 2123.73,834.25 h30; Top Overlay "SCK" at 2103.73,734.25 h30; Top Overlay "MISO" at 2078.74,634.25 h30; Top Overlay "MOSI" at 2083.74,534.25 h30; Top Overlay "TX" at 2133.72,434.25 h30; Top Overlay "RX" at 2133.72,334.25 h30; Top Overlay "AN1" at 2118.73,234.25 h30; Top Overlay "AN0" at 2108.73,134.25 h30; Top Overlay "BLADE DOCK" at 2072.83,40.35 h40; Bottom Overlay "AN0" at 2183.07,134.84 h30; Bottom Overlay "AN1" at 2184.06,234.25 h30; Bottom Overlay "RX" at 2183.07,334.65 h30; Bottom Overlay "TX" at 2185.89,433.27 h30; Bottom Overlay "MOSI" at 2180.12,534.45 h30; Bottom Overlay "MISO" at 2184.06,634.25 h30; Bottom Overlay "SCK" at 2183.46,734.25 h30; Bottom Overlay "!CS" at 2183.07,833.66 h30; Bottom Overlay "SDA" at 2183.46,934.25 h30; Bottom Overlay "SCL" at 2183.46,1034.25 h30; Bottom Overlay "GND" at 2183.46,1134.25 h30; Bottom Overlay "+5V" at 2183.46,1234.25 h30; Bottom Overlay "IO0" at 2396.65,133.86 h30; Bottom Overlay "IO1" at 2387.8,234.25 h30; Bottom Overlay "IO2" at 2397.12,334.25 h30; Bottom Overlay "IO3" at 2396.65,434.06 h30; Bottom Overlay "IO4" at 2396.65,535.43 h30; Bottom Overlay "IO5" at 2397.12,634.25 h30; Bottom Overlay "IO6" at 2397.12,734.25 h30; Bottom Overlay "IO7" at 2397.12,834.25 h30; Bottom Overlay "IO8" at 2397.12,934.25 h30; Bottom Overlay "IO9" at 2397.12,1034.25 h30
LBL3: Bottom Overlay "M4QIDB-PCB-01" at 977.63,1356.8 h40; Bottom Overlay "M4 QI Charger Board" at 977.63,1430.79 h30; Bottom Overlay "Morgan Grona   Jan 2019" at 981,1301 h30
U1: Top Overlay "1" at 1353,1062 h30